# EAGLE board stm32f4stamp-20131027 (EAGLE 7.1.0)
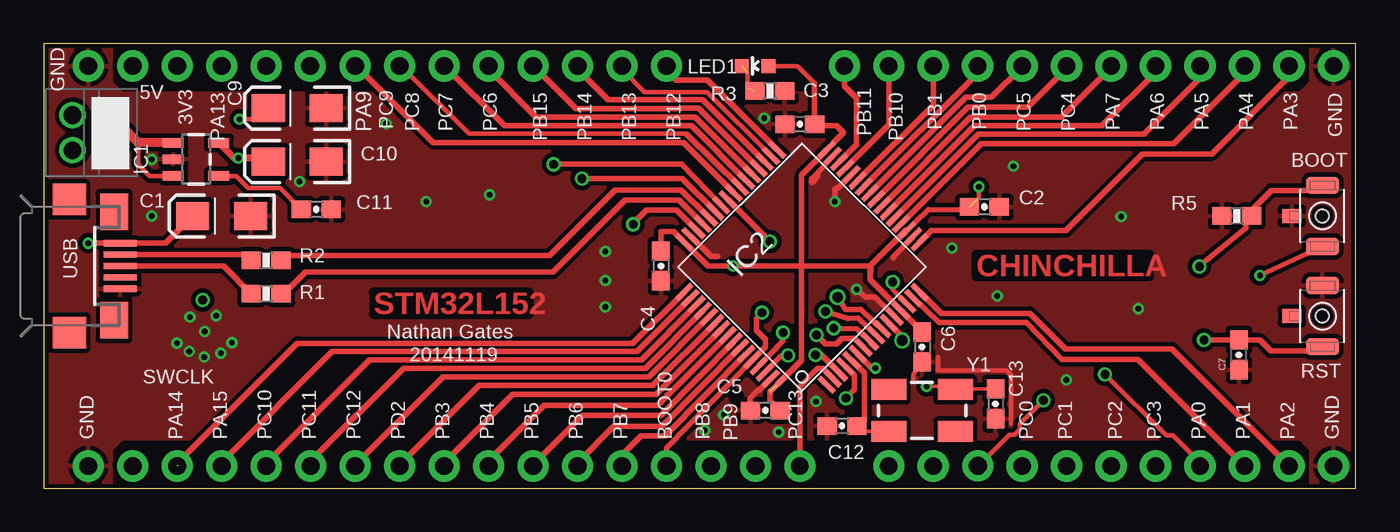
[diagram p0: board, top side]
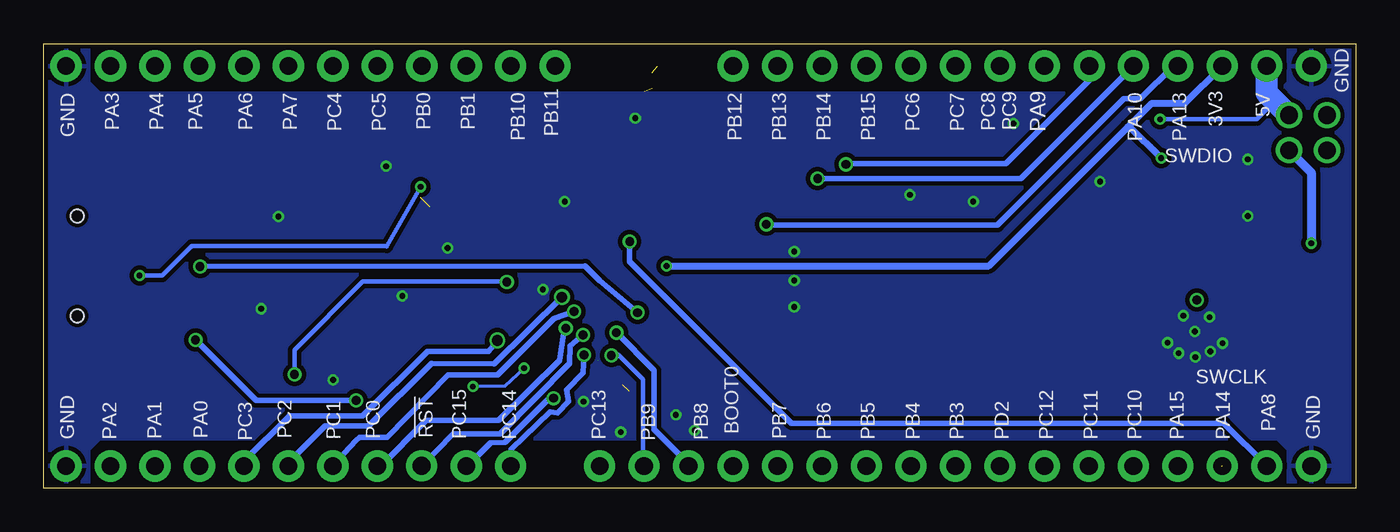
[diagram p1: board, bottom side, seen from below]

Size 74.93 x 25.4 mm. Coordinates in mm from the lower left corner, seen from the top.
Outline: 0,0 74.93,0 74.93,25.4 0,25.4 0,0
Copper layers (1*16): Top 0.035mm / dielectric 1.5mm / Bottom 0.035mm
Design rules "SeeedStudio_2layer_DRU_no_angle_20140221": minimum track width 6mil, minimum drill 12mil, track to track 6mil, track to pad 6mil, pad to pad 6mil, via to via 6mil, smd to smd 0mil, copper to edge 10mil, drill to drill 10mil, minimum pad ring 10mil, minimum via ring 6mil, stop-mask expansion 2mil, vias tented up to drill 100mil, thermal gap 10mil
tRestrict: 2 lines

## Footprints (pad centres in the part's own frame; a part is rotated, then mirrored left to right if it is on the bottom)
EIA3216-KIT = smd 1.9 x 1.6: A 1.65,0; C -1.65,0
0603-CAP = smd 1.1 x 1: 1 -0.85,0; 2 0.85,0
SOT23-5 = smd 0.55 x 1.2: 1 -0.95,-1.3; 2 0,-1.3; 3 0.95,-1.3; 4 0.95,1.3; 5 -0.95,1.3
LQFP64 = smd 0.3 x 1.2: 1 -3.75,-5.75; 2 -3.25,-5.75; 3 -2.75,-5.75; 4 -2.25,-5.75; 5 -1.75,-5.75; 6 -1.25,-5.75; 7 -0.75,-5.75; 8 -0.25,-5.75; 9 0.25,-5.75; 10 0.75,-5.75; 11 1.25,-5.75; 12 1.75,-5.75; 13 2.25,-5.75; 14 2.75,-5.75; 15 3.25,-5.75; 16 3.75,-5.75; 33 3.75,5.75; 34 3.25,5.75; 35 2.75,5.75; 36 2.25,5.75; 37 1.75,5.75; 38 1.25,5.75; 39 0.75,5.75; 40 0.25,5.75; 41 -0.25,5.75; 42 -0.75,5.75; 43 -1.25,5.75; 44 -1.75,5.75; 45 -2.25,5.75; 46 -2.75,5.75; 47 -3.25,5.75; 48 -3.75,5.75 | smd 1.2 x 0.3: 17 5.75,-3.75; 18 5.75,-3.25; 19 5.75,-2.75; 20 5.75,-2.25; 21 5.75,-1.75; 22 5.75,-1.25; 23 5.75,-0.75; 24 5.75,-0.25; 25 5.75,0.25; 26 5.75,0.75; 27 5.75,1.25; 28 5.75,1.75; 29 5.75,2.25; 30 5.75,2.75; 31 5.75,3.25; 32 5.75,3.75; 49 -5.75,3.75; 50 -5.75,3.25; 51 -5.75,2.75; 52 -5.75,2.25; 53 -5.75,1.75; 54 -5.75,1.25; 55 -5.75,0.75; 56 -5.75,0.25; 57 -5.75,-0.25; 58 -5.75,-0.75; 59 -5.75,-1.25; 60 -5.75,-1.75; 61 -5.75,-2.25; 62 -5.75,-2.75; 63 -5.75,-3.25; 64 -5.75,-3.75
1X02_2MM_TH = drill 1: 1 -1,0; 2 1,0
1X1-HEADER-HOLE = drill 1.016 pad 1.778: 1 0,0
LED-0603 = smd 0.8 x 0.8: A 0,-0.75; C 0,0.75
0603-RES = smd 1.1 x 1: 1 -0.85,0; 2 0.85,0
SWITCH-TACT-B3U-1100P-B = smd 1 x 1.9: 1 -1.75,0; 2 1.75,0 | smd 0.8 x 1.1: BOSS 0,1.75 | hole 0.762: 0,0
USB-MICROB-SMD = smd 0.35 x 1.9: D+ 0,2.9; D- -0.65,2.9; GND 1.3,2.9; ID 0.65,2.9; VBUS -1.3,2.9 | smd 1.8 x 1.9: MT1 -3.8,0; MT2 3.8,0 | smd 2.1 x 1.6: MT3 -3.1,2.55; MT4 3.1,2.55
CRYSTAL-SMD-5X3 = smd 2 x 1.2: 1 -1.9,-1.2; 2 1.9,-1.2; 3 1.9,1.2; 4 -1.9,1.2

## Placement (x,y rotation side)
C1  4u7  [EIA3216-KIT]  10.16,15.56 180 top
C2  100n  [0603-CAP]  53.72,16.08 0 top
C3  100n  [0603-CAP]  43.18,20.8 180 top
C4  100n  [0603-CAP]  35.24,12.7 270 top
C5  100n  [0603-CAP]  41.21,4.45 180 top
C6  100n  [0603-CAP]  50.16,8.06 270 top
C7  0.1uf  [0603-CAP]  68.26,7.62 90 top
C9  4u7  [EIA3216-KIT]  14.48,21.72 180 top
C10  4u7  [EIA3216-KIT]  14.48,18.67 180 top
C11  470p  [0603-CAP]  15.56,15.94 180 top
C12  22p  [0603-CAP]  45.59,3.56 180 top
C13  22p  [0603-CAP]  54.36,4.83 270 top
IC1  VREG-3V3  [SOT23-5]  8.7,18.8 270 top
IC2  STM32L152R6T  [LQFP64]  43.3,12.63 45 top
JMP-HOLDER  [1X02_2MM_TH]  1.65,20.32 90 top
JMP-USB  [1X02_2MM_TH]  3.81,20.32 90 top
JP1  PA9  [1X1-HEADER-HOLE]  15.21,24.13 0 top
JP2  5V  [1X1-HEADER-HOLE]  5.08,24.13 0 top
JP3  GND  [1X1-HEADER-HOLE]  2.54,24.13 0 top
JP4  3V3  [1X1-HEADER-HOLE]  7.62,24.13 0 top
JP5  GND  [1X1-HEADER-HOLE]  2.54,1.27 0 top
JP6  GND  [1X1-HEADER-HOLE]  73.66,1.27 0 top
JP7  GND  [1X1-HEADER-HOLE]  73.66,24.13 0 top
JP8  PB8  [1X1-HEADER-HOLE]  38.1,1.27 0 top
JP9  PA10  [1X1-HEADER-HOLE]  12.7,24.13 0 top
JP10  PA8  [1X1-HEADER-HOLE]  5.08,1.27 0 top
JP11  PA13  [1X1-HEADER-HOLE]  10.16,24.13 0 top
JP12  PC9  [1X1-HEADER-HOLE]  17.78,24.13 0 top
JP13  PC15  [1X1-HEADER-HOLE]  50.8,1.27 0 top
JP14  PC14  [1X1-HEADER-HOLE]  48.26,1.27 0 top
JP15  PC13  [1X1-HEADER-HOLE]  43.18,1.27 0 top
JP16  PC12  [1X1-HEADER-HOLE]  17.78,1.27 0 top
JP17  PC11  [1X1-HEADER-HOLE]  15.24,1.27 0 top
JP18  PC10  [1X1-HEADER-HOLE]  12.7,1.27 0 top
JP19  PC8  [1X1-HEADER-HOLE]  20.32,24.13 0 top
JP20  PC7  [1X1-HEADER-HOLE]  22.86,24.13 0 top
JP21  PC6  [1X1-HEADER-HOLE]  25.4,24.13 0 top
JP22  PC5  [1X1-HEADER-HOLE]  55.88,24.13 0 top
JP23  PC4  [1X1-HEADER-HOLE]  58.42,24.13 0 top
JP24  PC3  [1X1-HEADER-HOLE]  63.5,1.27 0 top
JP25  PC2  [1X1-HEADER-HOLE]  60.96,1.27 0 top
JP26  PC1  [1X1-HEADER-HOLE]  58.42,1.27 0 top
JP27  PC0  [1X1-HEADER-HOLE]  55.88,1.27 0 top
JP28  PD2  [1X1-HEADER-HOLE]  20.32,1.27 0 top
JP29  PA0  [1X1-HEADER-HOLE]  66.04,1.27 0 top
JP30  PA1  [1X1-HEADER-HOLE]  68.58,1.27 0 top
JP31  PA2  [1X1-HEADER-HOLE]  71.12,1.27 0 top
JP32  PA3  [1X1-HEADER-HOLE]  71.12,24.13 0 top
JP33  PA4  [1X1-HEADER-HOLE]  68.58,24.13 0 top
JP34  PA5  [1X1-HEADER-HOLE]  66.04,24.13 0 top
JP35  PA6  [1X1-HEADER-HOLE]  63.5,24.13 0 top
JP36  PA7  [1X1-HEADER-HOLE]  60.96,24.13 0 top
JP37  PA14  [1X1-HEADER-HOLE]  7.62,1.27 0 top
JP38  PA15  [1X1-HEADER-HOLE]  10.16,1.27 0 top
JP39  PB0  [1X1-HEADER-HOLE]  53.34,24.13 0 top
JP40  PB1  [1X1-HEADER-HOLE]  50.8,24.13 0 top
JP41  PB3  [1X1-HEADER-HOLE]  22.86,1.27 0 top
JP42  PB4  [1X1-HEADER-HOLE]  25.4,1.27 0 top
JP43  PB5  [1X1-HEADER-HOLE]  27.94,1.27 0 top
JP44  PB6  [1X1-HEADER-HOLE]  30.48,1.27 0 top
JP45  PB7  [1X1-HEADER-HOLE]  33.02,1.27 0 top
JP46  PB9  [1X1-HEADER-HOLE]  40.64,1.27 270 top
JP47  PB10  [1X1-HEADER-HOLE]  48.26,24.13 270 top
JP48  PB11  [1X1-HEADER-HOLE]  45.72,24.13 270 top
JP49  PB12  [1X1-HEADER-HOLE]  35.56,24.13 270 top
JP50  PB13  [1X1-HEADER-HOLE]  33.02,24.13 270 top
JP51  PB14  [1X1-HEADER-HOLE]  30.48,24.13 270 top
JP52  PB15  [1X1-HEADER-HOLE]  27.94,24.13 270 top
JP54  !RST  [1X1-HEADER-HOLE]  53.34,1.27 0 top
JP55  BOOT0  [1X1-HEADER-HOLE]  35.56,1.27 0 top
LED1  [LED-0603]  40.64,24.13 90 top
R1  22R  [0603-RES]  12.7,11.11 0 top
R2  22R  [0603-RES]  12.7,13.02 0 top
R3  470R  [0603-RES]  41.47,22.7 180 top
R5  10K  [0603-RES]  68.14,15.56 180 top
SW1  !RST  [SWITCH-TACT-B3U-1100P-B]  73.03,9.84 90 top
SW2  BOOT  [SWITCH-TACT-B3U-1100P-B]  73.03,15.56 90 top
USB  USB-MICROB-SMD  [USB-MICROB-SMD]  1.46,12.7 270 top
Y1  8MHz  [CRYSTAL-SMD-5X3]  50.16,4.45 180 top

## Library data of the parts
C1-C7 C9-C13 IC1 JMP-HOLDER JMP-USB JP1-JP52 JP54 JP55 LED1 R1-R3 R5 SW1 SW2 USB Y1 = stm32f4stamp
IC2 = micro-stm_v2

## Nets
3.3V: C2.1 C3.1 C4.1 C5.1 C6.1 C10.A IC1.5 IC2.13 IC2.19 IC2.32 IC2.48 IC2.64 JP4.1 LED1.A SW2.1
5V: C9.A IC1.1 IC1.3 JMP-USB.2 JP2.1
GND: C1.C C2.2 C3.2 C4.2 C5.2 C6.2 C7.1 C9.C C10.C C11.1 C12.2 C13.2 IC1.2 IC2.12 IC2.18 IC2.28 IC2.31 IC2.47 IC2.63 JP3.1 JP5.1 JP6.1 JP7.1 R3.1 R5.2 SW1.2 SW2.BOSS USB.GND
N$1: IC2.45 R1.2
N$2: IC2.44 R2.2
N$3: C1.A JMP-USB.1 USB.VBUS
N$4: IC2.14 JP29.1
N$5: R1.1 USB.D+
N$6: R2.1 USB.D-
N$7: IC2.15 JP30.1
N$8: C11.2 IC1.4
N$9: IC2.16 JP31.1
N$10: IC2.17 JP32.1
N$11: IC2.20 JP33.1
N$12: C13.1 IC2.6 Y1.1
N$13: IC2.21 JP34.1
N$14: IC2.22 JP35.1
N$15: C12.1 IC2.5 Y1.3
N$16: IC2.42 JP1.1
N$17: IC2.60 JP55.1 R5.1 SW2.2
N$18: LED1.C R3.2
N$19: IC2.23 JP36.1
N$21: IC2.41 JP10.1
N$22: IC2.43 JP9.1
N$23: IC2.46 JP11.1
N$24: IC2.49 JP37.1
N$25: IC2.50 JP38.1
N$26: IC2.26 JP39.1
N$27: IC2.27 JP40.1
N$28: IC2.55 JP41.1
N$29: IC2.56 JP42.1
N$30: IC2.57 JP43.1
N$31: IC2.58 JP44.1
N$32: IC2.59 JP45.1
N$33: IC2.61 JP8.1
N$34: IC2.62 JP46.1
N$35: IC2.29 JP47.1
N$36: IC2.30 JP48.1
N$37: IC2.33 JP49.1
N$38: IC2.34 JP50.1
N$39: IC2.35 JP51.1
N$40: IC2.36 JP52.1
N$41: IC2.4 JP13.1
N$42: IC2.3 JP14.1
N$43: IC2.2 JP15.1
N$44: IC2.53 JP16.1
N$45: IC2.52 JP17.1
N$46: IC2.51 JP18.1
N$47: IC2.40 JP12.1
N$48: IC2.39 JP19.1
N$49: IC2.38 JP20.1
N$50: IC2.37 JP21.1
N$51: IC2.25 JP22.1
N$52: IC2.24 JP23.1
N$53: IC2.11 JP24.1
N$54: IC2.10 JP25.1
N$55: IC2.9 JP26.1
N$56: IC2.8 JP27.1
N$57: IC2.54 JP28.1
N$58: C7.2 IC2.7 JP54.1 SW1.1
VLCD: IC2.1

## Tracks (layer width: path | path; a pad name or v marks a point on that pad's centre or on a via)
3.3V  (via drill 0.33)  (3 unrouted)
  Top 0.254: 53.4,16.61 v53.4,17.22 | 44.03,23.15 43.05,24.13 LED1.A | v69.46,12.16 SW2.1 | 47.18,11.93 47.18,12.73 43.28,12.73
  Top 0.305: 44.03,23.15 C3.1 | C3.1 43.99,20.95 43.97,20.98 | C3.1 44.12,21.05 44.12,21.17 44.56,20.73 45.27,20.73 45.67,20.33 45.64,20.3 45.13,19.79 45.09,19.73 IC2.32 | C2.1 52.77,15.91 50.54,15.93 47.25,12.77 | 47.22,11.89 IC2.13 50.16,8.95 C6.1 | 47.22,11.89 47.25,12.77 | IC2.32 44.65,19.29 44.65,19.24 | 49.12,14.54 49.12,14.56 IC2.19 49.25,14.75 47.16,12.67 47.16,12.65 47.18,12.64 47.18,11.93 47.22,11.89 | C4.1 35.24,14.64 35.26,14.66 35.96,14.66 IC2.48 37.93,12.7 v39.37,12.7 46.91,12.7 47.23,12.7 47.25,12.77 | C5.1 41.49,5.02 41.49,5.52 | IC2.64 43.28,7.31 43.28,12.73 43.28,17.89 44.71,19.32 IC2.32 | 43.28,7.3 43.28,7.32
  Top 0.406: IC1.5 10.89,18.86 v11.11,18.86 12.64,18.86 C10.A
  Bottom 0.254: v53.4,17.22 55.34,13.81 55.38,13.84 66.48,13.84 68.17,12.16 v69.46,12.16
  Bottom 0.406: v39.37,12.7 20.95,12.7 13.02,20.64 | 13.02,20.64 11.68,21.97 9.78,21.97 JP4.1 | v11.11,18.86 12.89,20.64 13.02,20.64
5V  (via drill 0.33)
  Top 0.254: v11.18,21.08 13.02,21.08 C9.A | IC1.3 6.04,17.85 5.4,18.49 5.4,19.75
  Top 0.508: IC1.1 5.4,19.75 5.38,19.75 JMP-USB.2
  Bottom 0.254: v11.18,21.08 5.65,21.08 4.61,22.12
  Bottom 1.27: JMP-USB.2 4.61,22.12 5.08,22.59 JP2.1
GND  (via drill 0.33)
  Top 0.254: 55.24,3.68 55.24,6.48 54.99,6.73 51.05,6.73 51.05,7.49 | 49.85,6.73 49.66,6.54 49.66,6.16
  Top 0.305: 43.92,17.69 IC2.31 | IC2.28 45.36,17.17 45.26,17.17 45.18,17.08 v45.18,16.37 | IC2.47 38.1,13.23 38.48,13.23 | C6.2 50.21,7.21 50.28,7.14 | IC2.12 47.48,10.92 46.93,10.92 46.92,10.92 v46.42,11.36 | IC2.18 48.51,13.25 48.51,13.14 | IC2.63 40.85,5.59 40.77,5.59 40.32,5.14 40.32,4.38
  Top 0.406: 43.92,17.69 43.89,17.5 43.97,17.58 43.97,17.63 44.15,17.82 44.15,17.89
  other vias: 6.16,18.8 19.56,20.83 14.61,17.53 44.1,4.95 55.37,18.4 51.87,13.73 32.07,11.87 41.15,21.15 54.46,10.98 8.35,9.78 32.07,13.53 21.84,16.38 32.07,10.35 9.84,9.86 25.46,16.76 61.53,15.53 6.16,15.56 58.41,6.19 37.75,3.3 38.83,4.19 41.97,3.21 62.52,10.26 9.19,8.95 7.6,8.29 8.3,7.81 9.16,7.49 10.11,7.72 10.75,8.32
  pour Bottom (isolate 0.254): 0,25.4 3.81,25.4 3.81,23.18 4.45,22.54 71.75,22.54 72.39,23.18 72.39,25.4 74.93,25.4 74.93,0 72.39,0 72.39,2.22 71.75,2.86 4.45,2.86 3.81,2.22 3.81,0 0,0
  pour Top (isolate 0.254): 0,25.4 3.81,25.4 3.81,23.18 4.45,22.54 71.75,22.54 72.39,23.18 72.39,25.4 74.93,25.4 74.93,0 72.39,0 72.39,2.22 71.75,2.86 4.45,2.86 3.81,2.22 3.81,0 0,0
N$1
  Top 0.305: R1.2 13.71,11.11 14.96,12.36 29.08,12.36 29.43,12.71 29.44,12.71 33.2,16.47 36.28,16.47 IC2.45
N$2
  Top 0.305: R2.2 13.84,13.31 28.89,13.31 32.63,17.05 36.41,17.05 IC2.44
N$3  (via drill 0.33)
  Top 0.305: C1.A 6.95,14 USB.VBUS v2.54,14
  Bottom 0.508: JMP-USB.1 2.54,18.05 v2.54,14
N$4  (via drill 0.5 pad 0.25)
  Top 0.254: IC2.14 48.48,11.37 v48.48,11.78 | v60.61,6.51 64.1,3.02 64.48,3.02 66.04,1.46 JP29.1
  Bottom 0.254: v48.48,11.78 48.74,11.81 56.71,11.81 60.61,7.91 v60.61,6.51
N$5
  Top 0.305: USB.D+ 10.26,12.7 R1.1
N$6
  Top 0.305: USB.D- 11.52,13.35 R2.1
N$7
  Top 0.305: IC2.15 49.68,10.86 51.11,9.46 56.11,9.46 58.14,7.37 62.48,7.37 JP30.1
N$8
  Top 0.254: IC1.4 10.98,17.85 11.68,17.14 13.5,17.14 C11.2
N$9
  Top 0.305: IC2.16 51.25,9.99 56.32,9.99 58.34,7.97 64.42,7.97 JP31.1
N$10
  Top 0.305: IC2.17 50.71,14.73 58.38,14.73 62.75,19.1 66.7,19.1 71.12,23.52 JP32.1
N$11
  Top 0.305: IC2.20 53.55,19.7 64.55,19.7 68.58,23.73 JP33.1
N$12  (via drill 0.33)
  Top 0.203: 47.08,7.03 v47.5,6.86 | v50.42,5.81 52.1,5.81 Y1.1 52.06,5.68 C13.1
  Top 0.305: IC2.6 47.3,6.86 v47.5,6.86
  Bottom 0.203: v47.5,6.86 48.58,5.84 v50.42,5.81
N$13
  Top 0.305: 66.04,23.74 JP34.1 66.04,23.45 62.83,20.23 53.38,20.23 IC2.21
N$14
  Top 0.305: IC2.22 53.15,20.71 60.44,20.71 63.5,23.77 JP35.1
N$15
  Top 0.203: 46.86,6.54 46.86,3.83 46.86,3.25 Y1.3 47.72,3.25
  Top 0.305: IC2.5 46.86,6.59 46.86,3.83 46.59,3.56 C12.1
N$16  (via drill 0.5 pad 0.3)
  Top 0.305: IC2.42 38.67,16.19 36.42,18.51 v29.11,18.51
  Bottom 0.305: v29.11,18.51 29.08,18.54 19.97,18.54 15.21,23.3 JP1.1
N$17  (via drill 0.5 pad 0.25)
  Top 0.305: v66.01,12.67 66.01,12.7 68.64,14.86 68.64,15.22 R5.1 68.99,15.9 70.1,17.02 72.74,17.02 SW2.2 | v41.02,10.03 40.7,9.72 40.7,9.02 41.21,8.51 41.21,8.07 IC2.60 35.56,2.32 JP55.1 35.56,1.4
  Bottom 0.305: v41.02,10.03 43.18,11.87 44.01,12.7 v66.01,12.67
N$18  (2 unrouted)
  Top 0.254: 40.2,23.75 40.2,22.86
N$19
  Top 0.305: IC2.23 52.93,21.2 58.11,21.2 60.96,24.06 JP36.1
N$20  (via drill 0.5 pad 0.3)
  other vias: 9.08,10.76
N$21  (via drill 0.5 pad 0.3)
  Top 0.305: v41.47,14.1 39.09,16.5 IC2.41
  Bottom 0.305: JP10.1 7.53,3.71 32.23,3.71 41.47,12.95 v41.47,14.1
N$22  (via drill 0.5 pad 0.03)
  Top 0.305: 38.29,15.88 IC2.43 36.55,17.61 36.49,17.7 v30.73,17.7
  Bottom 0.305: v30.73,17.7 19.13,17.7 JP9.1
N$23  (via drill 0.5 pad 0.03)
  Top 0.305: IC2.46 36.13,15.91 34.44,15.91 33.66,15.13 v33.66,15.08
  Bottom 0.305: v33.66,15.08 33.61,15.03 20.46,15.03 13.24,22.25 12.3,22.25 10.42,24.13 JP11.1
N$24  (1 unrouted)
  Top 0.305: IC2.49 33.62,8.29 14.48,8.29 7.68,1.49 7.68,1.27
N$25
  Top 0.305: IC2.50 33.88,7.81 16.48,7.81 10.16,1.49 JP38.1
N$26
  Top 0.305: IC2.26 53.34,23.73 JP39.1
N$27
  Top 0.305: IC2.27 50.8,21.9 JP40.1
N$28
  Top 0.305: IC2.55 34.98,5.37 26.77,5.37 22.86,1.46 JP41.1
N$29
  Top 0.305: IC2.56 35.05,4.73 28.57,4.73 25.4,1.56 JP42.1 25.4,1.3
N$30
  Top 0.305: IC2.57 35.25,4.16 30.77,4.16 27.94,1.33 JP43.1
N$31
  Top 0.305: IC2.58 35.32,3.52 32.54,3.52 30.48,1.46 JP44.1
N$32
  Top 0.305: 33.02,1.33 JP45.1 33.02,1.91 34.1,2.98 35.49,2.98 IC2.59
N$33  (via drill 0.5 pad 0.25)
  Top 0.305: IC2.61 42.2,8.38 v42.23,8.89
  Bottom 0.305: v42.23,8.89 40.07,6.73 40.07,3.37 38.1,1.4 JP8.1
N$34  (via drill 0.5 pad 0.25)
  Top 0.305: IC2.62 42.12,7.56 v42.51,7.59
  Bottom 0.254: 40.64,1.52 40.7,1.52 40.7,6.22 42.1,7.62 v42.51,7.59
  Bottom 0.305: 40.64,1.52 JP46.1
N$35
  Top 0.305: IC2.29 48.26,20.77 JP47.1
N$36
  Top 0.305: IC2.30 46.4,19.62 46.4,22.3 45.72,22.99 JP48.1
N$37
  Top 0.305: IC2.33 37.91,23.32 36.11,23.32 35.56,23.87 JP49.1
N$38
  Top 0.254: IC2.34 37.89,22.64 34.32,22.64 33.02,23.94 JP50.1
N$39
  Top 0.305: IC2.35 37.62,22.2 32.24,22.2 30.48,23.96 JP51.1
N$40
  Top 0.305: IC2.36 37.4,21.71 36.39,21.71 36.37,21.7 30.41,21.7 27.98,24.13 JP52.1
N$41  (via drill 0.5 pad 0.03)
  Top 0.305: IC2.4 46.29,6.46 46.29,5.65 v45.81,5.14
  Bottom 0.305: v45.81,5.14 46.1,5.11 48.58,2.63 49.4,2.6 50.74,1.27 JP13.1
N$42  (via drill 0.5 pad 0.03)
  Top 0.305: IC2.3 44.42,7.62 v44.07,7.62
  Bottom 0.305: JP14.1 48.23,1.3 48.23,2.22 46.01,4.35 45.59,4.32 44.96,4.95 45.09,5.62 44.13,6.6 v44.07,7.62
N$43
  Top 0.305: IC2.2 44.49,6.84 44.19,6.84 43.18,5.83 JP15.1
N$44
  Top 0.305: IC2.53 34.58,6.35 22.8,6.35 17.78,1.33 JP16.1
N$45
  Top 0.305: IC2.52 34.38,6.86 20.54,6.86 15.24,1.56 JP17.1
N$46
  Top 0.305: IC2.51 34.15,7.33 18.61,7.33 12.7,1.43 JP18.1
N$47
  Top 0.305: IC2.40 36.53,19.75 35.64,19.75 22.25,19.75 17.87,24.13 JP12.1
N$48
  Top 0.254: 36.7,20.22 36.67,20.26 24.29,20.26 20.41,24.13 JP19.1
  Top 0.305: IC2.39 36.7,20.22 | 20.39,24.13 JP19.1
N$49
  Top 0.305: IC2.38 36.99,20.71 26.31,20.71 22.89,24.13 JP20.1
N$50
  Top 0.305: IC2.37 37.19,21.21 28.12,21.21 25.4,23.93 JP21.1
N$51
  Top 0.305: IC2.25 52.66,22.35 54.13,22.35 55.88,24.1 JP22.1
N$52
  Top 0.305: IC2.24 52.79,21.77 56.2,21.77 58.42,23.99 JP23.1
N$53  (via drill 0.6)
  Top 0.305: IC2.11 48.96,8.74 v49.02,8.45
  Bottom 0.305: v49.02,8.45 49.53,7.81 53.02,7.81 56.71,4.13 60.9,4.13 63.5,1.52 JP24.1
N$54  (via drill 0.6)
  Top 0.305: v45.34,10.92 45.78,10.22 46.67,10.22 47.99,8.97 IC2.10
  Bottom 0.305: v45.34,10.92 49.21,7.11 52.77,7.14 56.39,3.56 58.86,3.56 60.96,1.46 JP25.1
N$55  (via drill 0.5 pad 0.03)
  Top 0.305: IC2.9 46.49,9.73 45.93,9.7 v44.64,10.1
  Bottom 0.305: JP26.1 57.09,2.73 56.9,2.92 55.31,2.92 51.85,6.48 49.02,6.48 45.78,9.72 v44.64,10.1
N$56  (via drill 0.5 pad 0.03)
  Top 0.305: IC2.8 46.43,9.11 v45.12,9.14
  Bottom 0.305: v45.12,9.14 45.24,8.83 45.47,7.3 48.96,3.87 53.09,3.87 55.75,1.21 JP27.1
N$57
  Top 0.305: IC2.54 34.78,5.87 24.86,5.87 20.32,1.33 JP28.1
N$58  (via drill 0.5 pad 0.03, 0.5 pad 0.3)
  Top 0.254: v57.09,5.02 55.75,3.68 55.75,3.37 55.44,3.05 55.15,3.05 53.38,1.27 JP54.1
  Top 0.305: SW1.1 72.77,7.84 70.07,7.84 69.44,8.47 C7.2 68.25,8.45 68.25,8.32 68.08,8.48 v66.26,8.48 | v44.13,8.76 44.64,8.26 45.28,8.26 45.59,8.57 46.29,8.57 46.42,8.45 IC2.7 | JP54.1
  Bottom 0.305: JP54.1 51.56,3.11 48.86,3.11 44.9,7.14 44.86,8.13 v44.13,8.76 | v66.26,8.48 62.8,5.02 v57.09,5.02

## Text on the board
Top: CHINCHILLA | STM32L152
tStop: CHINCHILLA | STM32L152
_tsilk: BOOT | Nathan Gates | 20141119 | RST | SWCLK
_bsilk: SWDIO | SWCLK